# Altium PCB zhukong.PcbDoc
Units mm, origin at the board's own origin, x right, y up, seen from the top; angles counter-clockwise.
Board outline 83.59 x 80.22 mm, 2 copper layers (Top Layer, Bottom Layer); 101 components, 180 nets, 437 pads, 116 vias.
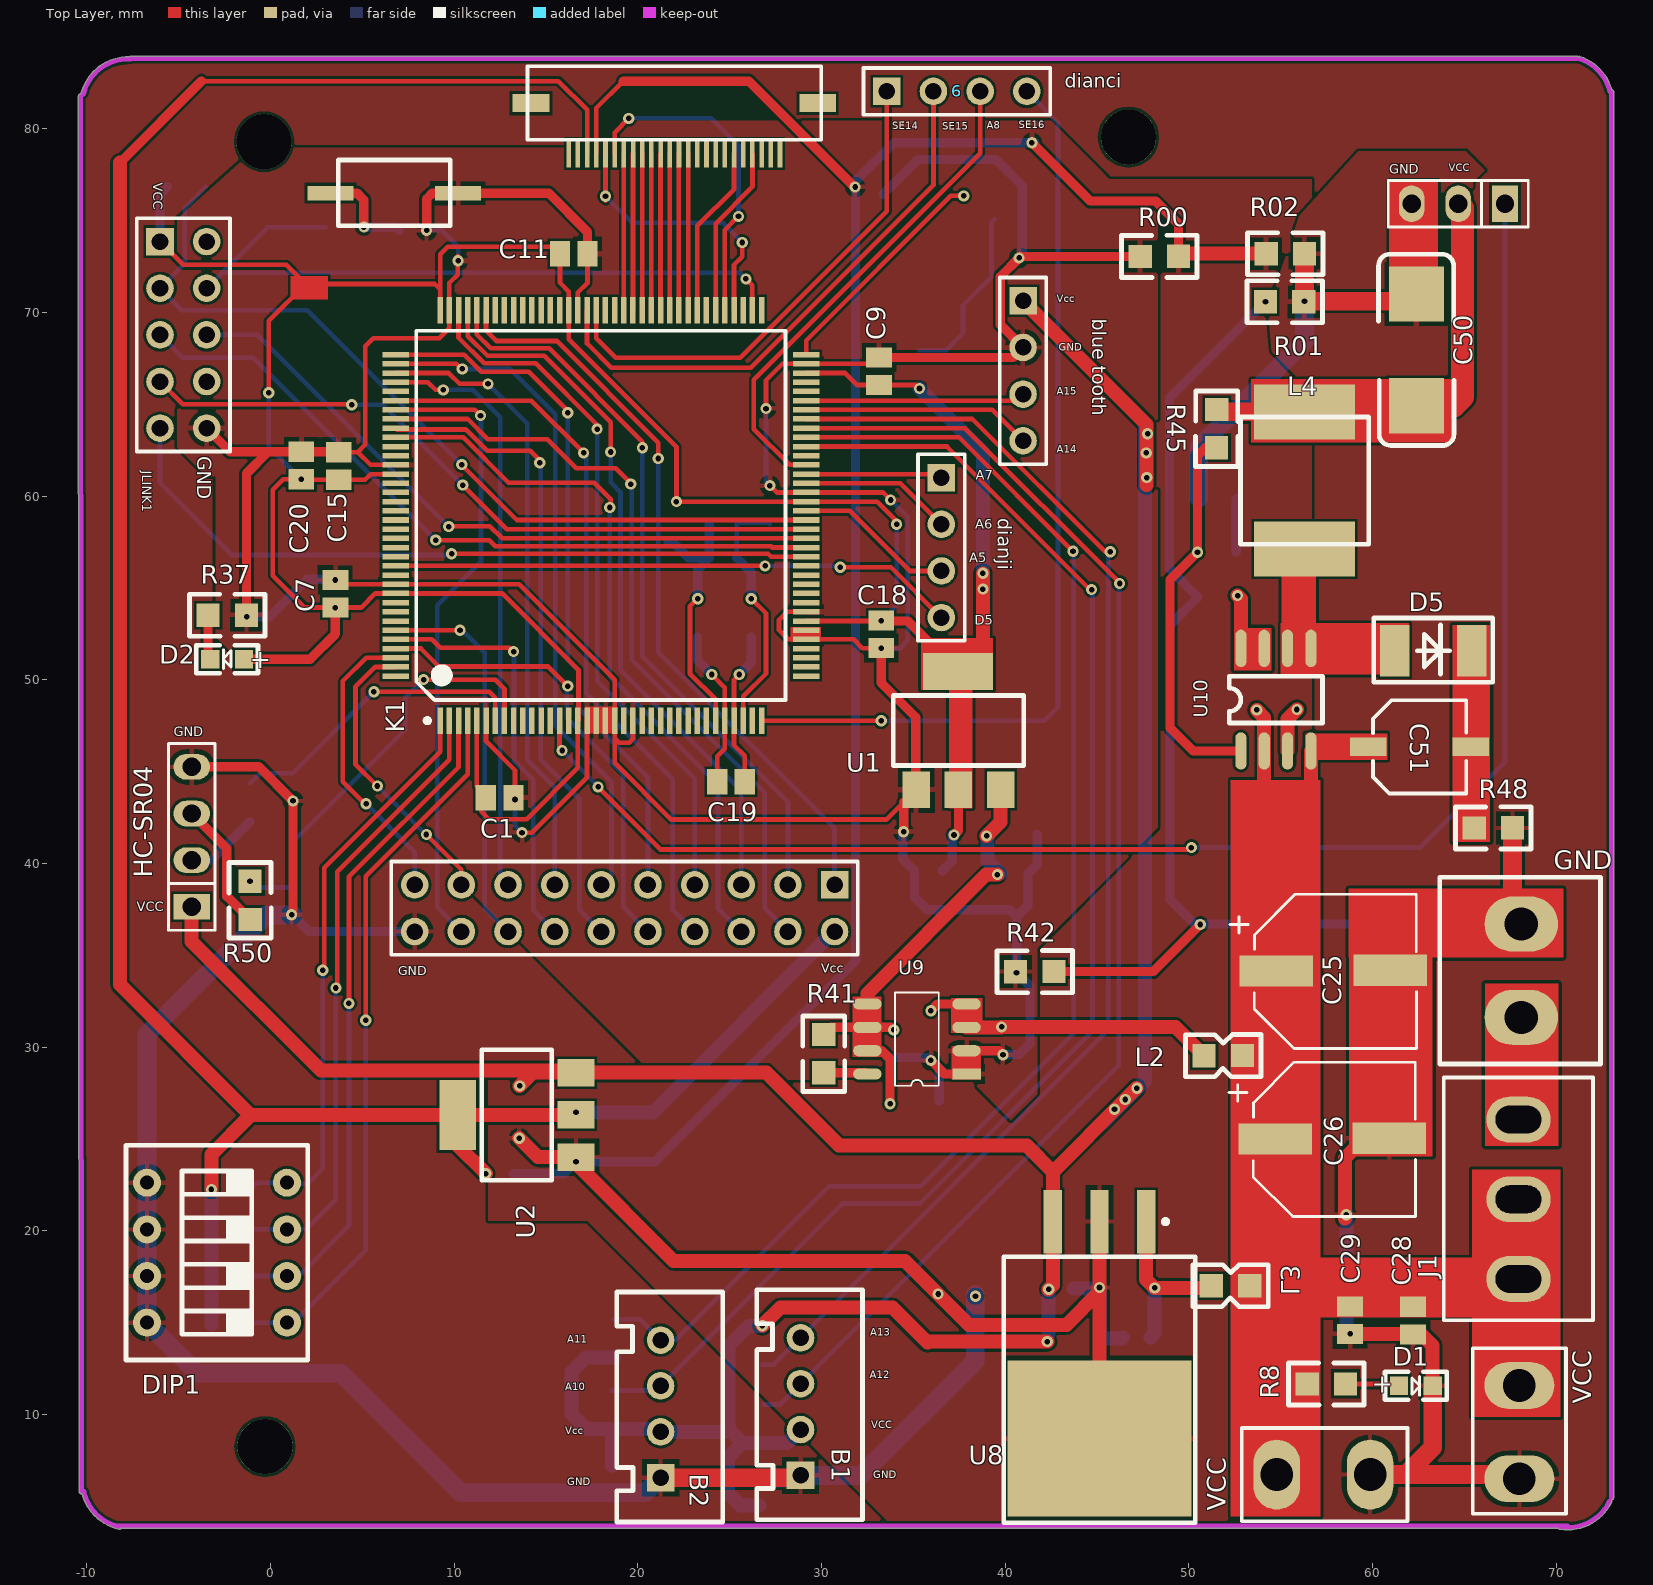
[diagram p0: Top Layer view]
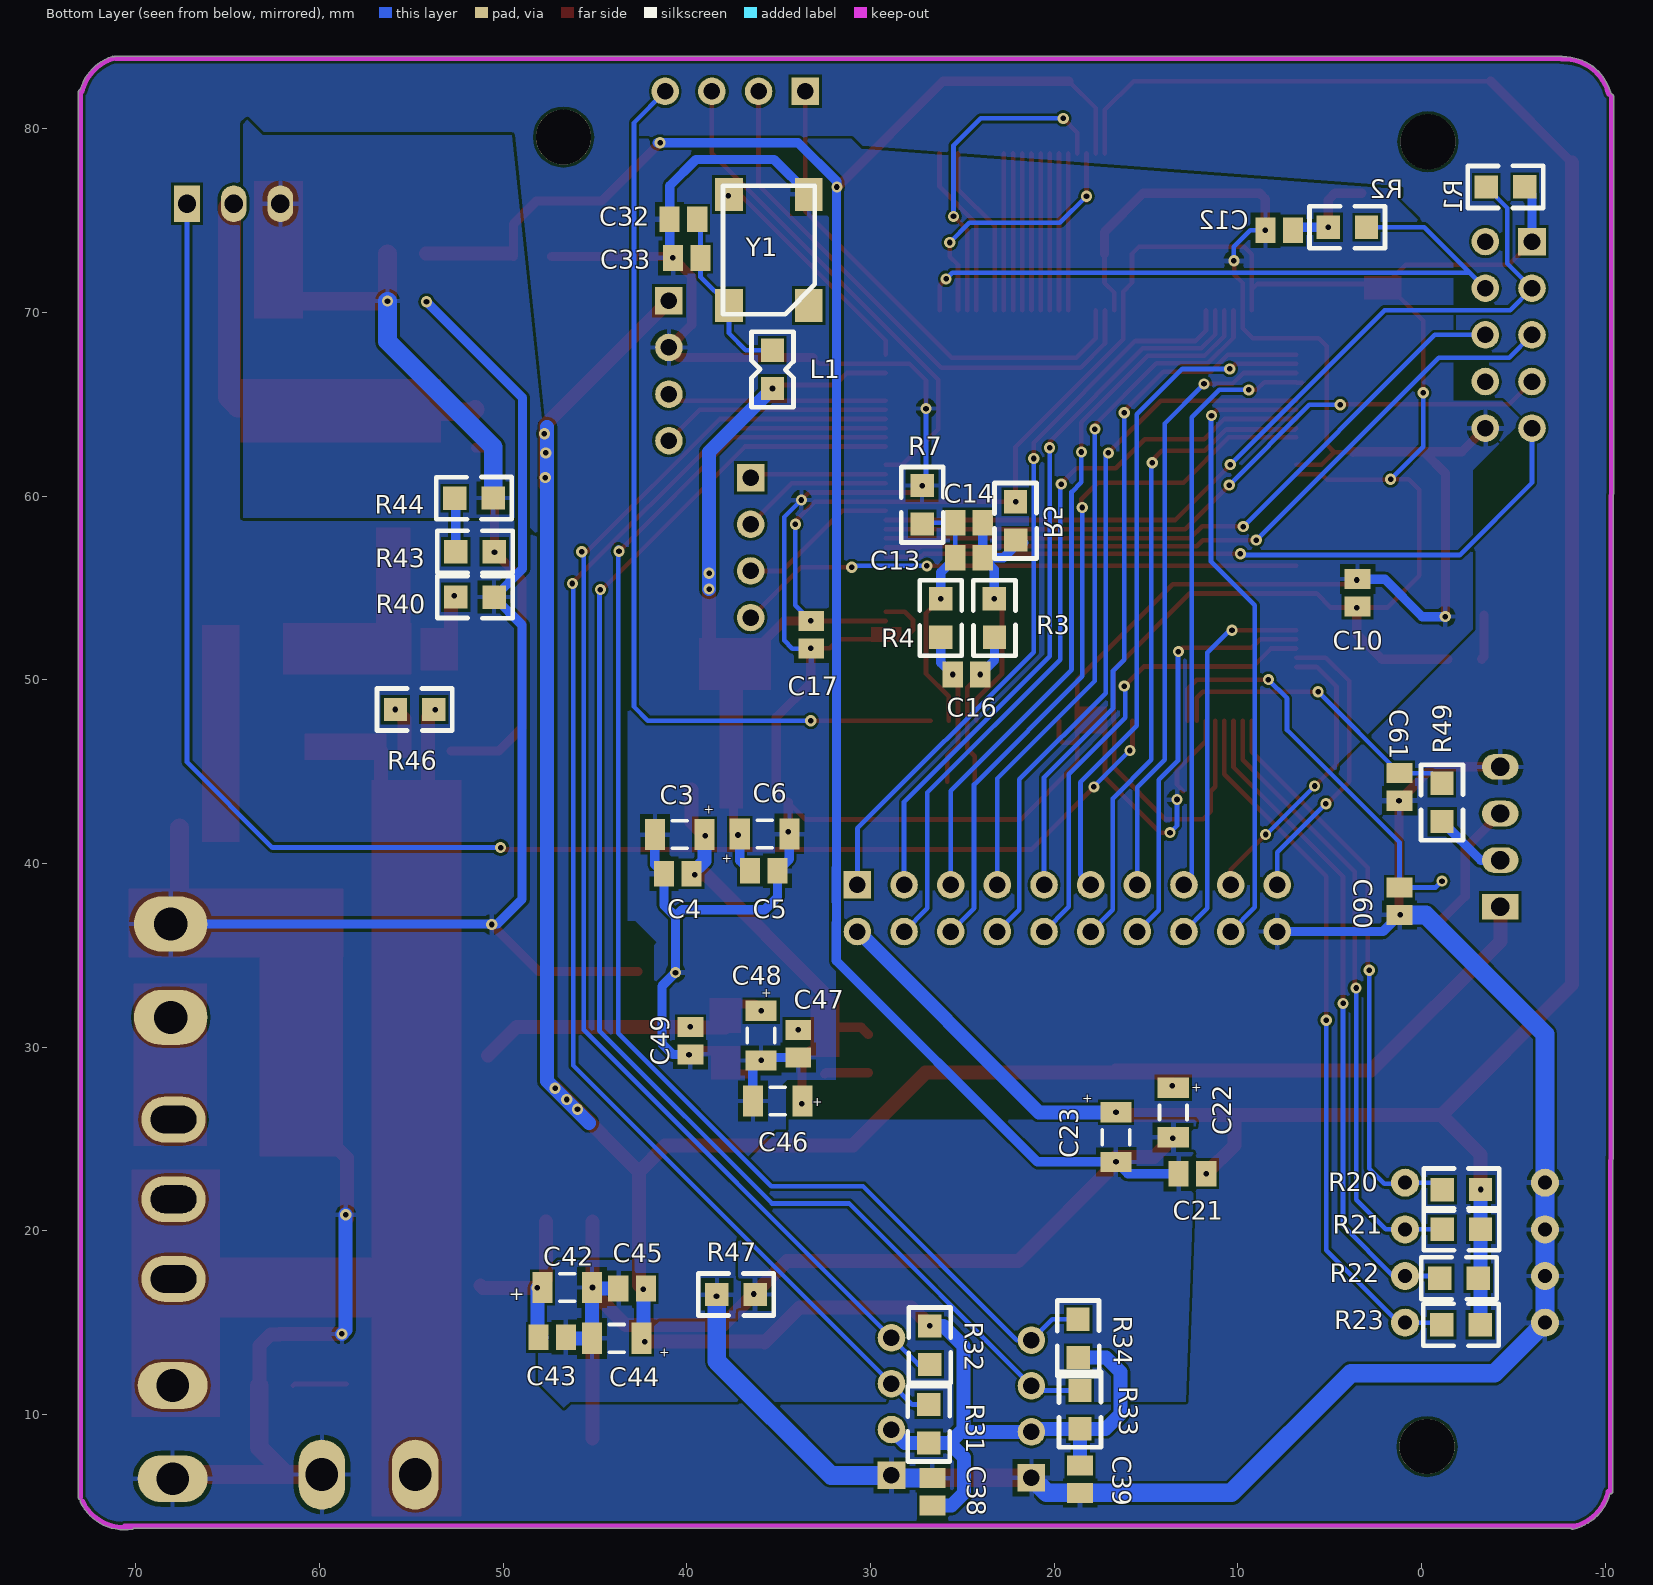
[diagram p1: Bottom Layer view, seen from below]

## Layer stack, top to bottom
Top Solder: solder mask 0.0102, Solder Resist, Dk 3.5
Top Layer: signal copper 0.0356
Dielectric1: dielectric 0.32, FR-4, Dk 4.8
Bottom Layer: signal copper 0.0356
Bottom Solder: solder mask 0.0102, Solder Resist, Dk 3.5

## Board outline
-10.261,5.679 cw(c-10.287,5.804) -10.415,5.804 -10.465,78.181 cw(c-10.338,78.181) -10.465,78.181 -10.465,81.765 cw(c-10.338,81.765) -10.427,81.856 -10.428,81.855 -10.296,81.987 cw(c-7.747,81.28) -7.693,83.925 cw(c-7.621,83.82) -7.621,83.947 71.12,83.947 cw(c71.12,83.82) 71.189,83.927 cw(c71.254,83.817) 71.293,83.938 cw(c70.477,81.421) 73.022,82.142 cw(c73,82.017) 73.127,82.017 73.127,5.486 cw(c73,5.486) 73.019,5.36 cw(c72.908,5.297) 73.036,5.297 cw(c72.908,5.297) 73.024,5.243 cw(c70.631,6.371) 70.187,3.763 cw(c70.209,3.889) 70.109,3.81 -8.119,3.81 cw(c-8.221,3.886) -8.247,3.761 cw(c-7.702,6.35)

## Design rules (kind name [scope] priority, off if disabled: settings)
Clearance 安全距离 [All] p1: gap=0.152
FabricationTestpoint [(IsPad And (OnTopLayer Or OnBottomLayer))] p1: side=3 testpointundercomponent=TRUE minsize=1.016 maxsize=2.54 preferedsize=1.524 minholesize=0 maxholesize=1.016 preferedholesize=0.813 testpointgrid=0.025 allowsidetop=TRUE allowsidebottom=TRUE usegrid=TRUE gridtolerance=0
HoleSize [All] p1: absolutevalues=TRUE maxlimit=5 minlimit=0.025 maxpercent=80.000 minpercent=20.000
PolygonConnect [All] p1: connectstyle=Relief reliefconductorwidth=0.254 reliefentries=4 polygonreliefangle="90 Angle" airgapwidth=0.254
RoutingVias [All] p1: holewidth=0.711 width=1.27 viastyle="Through Hole" minholewidth=0.711 minwidth=1.27 maxholewidth=0.711 maxwidth=1.27
SolderMaskExpansion [All] p1: expansion=0.102
UnpouredPolygon [All] p1: allowunpoured=FALSE
Width VCC7.2 [InNet('VCC_7.2V')] p1: maxlimit=2.54 minlimit=0.152 preferedwidth=2.54
Width VCC3.3 [InNet('VCC_3V3')] p2: maxlimit=2.54 minlimit=0.152 preferedwidth=0.508
Width GND [InNet('GND')] p3: maxlimit=2.54 minlimit=0.152 preferedwidth=0.508
Width 其他 [All] p4: maxlimit=2.54 minlimit=0.127 preferedwidth=0.508
27 further rules are at their usual default settings.

## Classes and differential pairs
component class 原理图: B1 B2 "blue tooth" C1 C3 C4 C5 C6 C7 C9 C10 C11 C12 C13 C14 C15 C16 C17 C18 C19 C20 C21 C22 C23 C25 C26 C28 C29 C32 C33 C38 C39 C42 C43 C44 C45 C46 C47 C48 C49 C50 C51 C60 C61 D1 D2 D5 DIP1 GND HC-SR04 J1 JLINK1 L1 L2 L3 L4 R1 R2 R3 R4 R5 R7 R8 R31 R32 R33 R34 R37 R40 R42 R43 R44 R45 R46 R47 R48 R49 R50 U2 U8 U9 U10 Y1

## Components (designator, comment, footprint, x,y, rotation, side; value= is the part's Value field where it differs from the comment)
6 "Comment" HDR1X4#1 33.553,82.042 r0 top
B1 "MHDR1X4" 3PIN-2.54 28.854,6.68 r90 top
B2 "MHDR1X4" 3PIN-2.54 21.234,6.557 r90 top
"blue tooth" "Header 4" HDR1X4#2 40.97,70.637 r270 top (schematic designator P1)
C1 "0.1uF" c0805 12.471,43.586 r180 top
C3 "10uF/16V" C1206 40.386,41.58 r0 bottom
C4 "0.1uF" c0805 40.488,39.446 r180 bottom
C5 "0.1uF" c0805 35.814,39.599 r0 bottom
C6 "10uF/16V" C1206 35.763,41.605 r180 bottom
C7 "0.1uF" c0805 3.531,54.686 r270 top
C9 "0.1uF" c0805 33.129,66.802 r90 top
C10 "0.1uF" c0805 3.48,54.747 r270 bottom
C11 "0.1uF" c0805 16.51,73.203 r0 top
C12 "0.1uF" c0805 7.747,74.473 r180 bottom
C13 "Cap Semi" C0805 24.634,56.642 r180 bottom
C14 "10μF" C0805 24.634,58.547 r180 bottom
C15 "0.1uF" c0805 3.708,61.646 r90 top
C16 "Cap Semi" C0805 24.773,50.292 r180 bottom
C17 "0.1uF" c0805 33.223,52.451 r270 bottom
C18 "0.1uF" c0805 33.249,52.476 r270 top
C19 "Cap Semi" C0805 25.07,44.45 r180 top
C20 "0.1uF" c0805 1.676,61.671 r90 top
C21 "0.1uF" C0805 12.471,23.114 r180 bottom
C22 "10uF/16V" C1206 13.513,26.441 r270 bottom
C23 "10uF/16V" C1206 16.629,25.104 r270 bottom
C25 "470uF/16V" C8X8MM 60.968,34.188 r0 top
C26 "470uF/16V" C8X8MM 60.909,25.044 r0 top
C28 "0.1uF" C0805 62.205,15.113 r90 top
C29 "0.1uF" C0805 58.776,15.138 r270 top
C32 "10uF" c0805 40.183,75.082 r180 bottom
C33 "0.1uF" c0805 40.005,72.974 r180 bottom
C38 "0.1uF" C0805 26.619,5.791 r90 bottom
C39 "0.1uF" C0805 18.588,6.481 r270 bottom
C42 "10uF/25V" C1206 46.507,16.916 r180 bottom
C43 "0.1uF" C0805 47.32,14.199 r0 bottom
C44 "10uF/16V" C1206 43.815,14.148 r0 bottom
C45 "0.1uF" C0805 42.977,16.866 r180 bottom
C46 "10uF/16V" C1206 35.052,27.076 r0 bottom
C47 "0.1uF" C0805 33.934,30.189 r90 bottom
C48 "10uF/25V" C1206 35.953,30.632 r270 bottom
C49 "0.1uF" C0805 39.802,30.353 r90 bottom
C50 "10uF/25V" "PCBComponent_1 - duplicate6" 62.382,64.922 r90 top
C51 "22uF" CAP5X5 62.56,46.355 r0 top
C60 "0.1uF" C0805 1.194,37.948 r90 bottom
C61 "0.1uF" C0805 1.194,44.171 r90 bottom
CAM1 "Header 24" 24PIN0.5MM软排座 10.236,82.906 r180 top
D1 "LED0" d0603 62.382,11.557 r0 top
D2 "LED0" d0603 -2.388,51.13 r180 top
D5 "Diode 1N914" SMA 61.214,51.587 r0 top
dianci "Header 10X2" HDR2X10 30.709,38.837 r180 top (schematic designator LCD1)
dianji "Header 4" HDR1X4#2 36.525,61.011 r270 top (schematic designator P1)
DIP1 "Header 4X2" "PCBComponent_1 - duplicate1" 0.889,22.619 r270 top
GND "Header 2" "PCBComponent_1 - duplicate5" 68.097,31.623 r90 top (schematic designator J2)
GND "Header 3" SIP3 67.208,75.921 r180 top (schematic designator SEV1)
HC-SR04 "Header 4" SIP4 -4.293,37.643 r90 top
J1 "Header 3" 7.2 67.945,26.06 r270 top
JLINK1 "Header 5X2" HDR2X5 -6.02,73.863 r270 top
K1 "K60" K60_QFP144 18.085,59.055 r90 top
L1 "100MHZ" l0805 35.331,65.862 r90 bottom
L2 "" L0805 50.825,29.54 r0 top
L3 "Inductor" L0805 53.315,17.018 r180 top
L4 "10uH" 电感7x7 56.363,60.935 r90 top
R00 "0" R0805#1 47.346,73.05 r0 top (schematic designator R47)
R01 "0" R0805#1 56.261,70.587 r180 top (schematic designator R47)
R1 "10K" R0805#1 -3.531,76.835 r180 bottom
R02 "0" R0805#1 54.204,73.203 r0 top (schematic designator R47)
R2 "10K" r0805 5.08,74.651 r180 bottom
R3 "0" R0805#1 23.249,52.324 r90 bottom
R4 "0" R0805#1 26.17,52.324 r90 bottom
R5 "0" R0805#1 22.098,59.703 r270 bottom
R7 "0" R0805#1 27.186,60.579 r270 bottom
R8 "Res1" R0805#1 56.439,11.659 r0 top
R20 "100K" R0805#1 -3.22,22.25 r0 bottom
R21 "100K" R0805#1 -3.22,20.091 r0 bottom
R22 "100K" R0805#1 -3.093,17.424 r0 bottom
R23 "100K" R0805#1 -3.2,14.884 r0 bottom
R31 "4.7K" R0805#1 26.822,10.541 r270 bottom
R32 "4.7K" R0805#1 26.772,12.725 r90 bottom
R33 "4.7K" R0805#1 18.593,11.307 r270 bottom
R34 "4.7K" R0805#1 18.694,15.193 r270 bottom
R37 "1K" R0805#1 -3.404,53.518 r0 top
R40 "0" R0805#2 52.578,54.508 r180 bottom
R41 "250K" R0805#3 30.124,28.6 r90 bottom
R42 "0" R0805#1 40.564,34.112 r0 top
R43 "10K" R0805#1 52.578,56.972 r180 bottom
R44 "0" R0805#1 52.629,59.893 r180 bottom
R45 "68K" R0805#2 51.511,64.719 r270 top
R46 "2.7K" R0805#1 53.772,48.387 r0 bottom
R47 "0" R0805#1 36.271,16.535 r0 bottom
R48 "0" R0805#1 65.532,41.935 r0 top
R49 "100K" R0805#1 -1.118,44.374 r270 bottom
R50 "100K" R0805#1 -1.118,39.04 r270 top
SW1 "SW-PB" key 9.779,74.727 r180 top
U1 "AMS1117-3V3" SOT-223 37.389,47.32 r0 top
U2 "AMS117" SOT-223 13.327,26.247 r90 top
U8 "LM2940" TO263 45.136,14.275 r270 top
U9 "TPS7350" sop8#1 37.893,28.538 r180 top
U10 "AS1015" sop8#2 52.807,46.152 r90 top
VCC "Header 2" 1 54.788,6.731 r0 top (schematic designator J3)
VCC "Header 2" 1 67.996,6.502 r90 top (schematic designator J3)
Y1 "MCG 50M" MCG 33.35,70.383 r90 bottom

## Footprints (in the part's own frame and the unit in brackets; to place one, negate y for a bottom-side part, rotate by r counter-clockwise, add the part's x,y. Pads: shape width x height; smd on the part's side, far side on the other; paste and mask are expansions set on the pad)
1 [mil]
  oval 100x150 hole 70: 1(0,0) 2(200,0)
  silkscreen extent -75,-100 280,100
3PIN-2.54 [mm]
  rect 1.5x1.5 hole 0.9: 1(0,0)
  round 1.5 hole 0.9: 2(2.5,0) 3(5,0) 4(7.493,0)
  silkscreen extent -2.41,-3.38 10.11,2.39
7.2 [mm]
  oval 2.5x3.5 hole 1.5 slot 2.5 at 90 deg: 1(0,0) 2(4.34,0) 3(8.68,0)
  silkscreen extent -2.29,-4.06 10.92,4.06
24PIN0.5MM软排座 [mm]
  rect 0.25x1.5 smd: 1(-6,4.25) 2(-6.5,4.25) 3(-7,4.25) 4(-7.5,4.25) 5(-8,4.25) 6(-8.5,4.25) 7(-9,4.25) 8(-9.5,4.25) 9(-10,4.25) 10(-10.5,4.25) 11(-11,4.25) 12(-11.5,4.25) 13(-12,4.25) 14(-12.5,4.25) 15(-13,4.25) 16(-13.5,4.25) 17(-14,4.25) 18(-14.5,4.25) 19(-15,4.25) 20(-15.5,4.25) 21(-16,4.25) 22(-16.5,4.25) 23(-17,4.25) 24(-17.5,4.25)
  rect 2x1 smd: 25(-3.95,1.5) 26(-19.55,1.5)
  silkscreen extent -19.75,-0.5 -3.75,3.5
C8X8MM [mm]
  rect 4x1.7 smd: 1(-6.202,-0.042) 2(0,0)
  silkscreen extent -8.73,-4.27 1.43,4.14, body extent -7.6,-4.2 1.4,4.1, height 10.5
c0805 [mm] "Chip Capacitor, Body 2.0x1.3mm, IPC High Density"
  rect 1.1x1.4 smd: 1(-0.75,0) 2(0.75,0)
  body extent -1.1,-0.72 1.1,0.72, height 1.4
C0805 [mm] "Chip Capacitor, Body 2.0x1.3mm, IPC High Density"
  rect 1.1x1.4 smd: 1(-0.75,0) 2(0.75,0)
  body extent -1.1,-0.72 1.1,0.72, height 1.4
C1206 [mm] "Chip Capacitor, Body 3.2x1.6mm, IPC High Density"
  rect 1.1x1.7 smd: 1(-1.35,0) 2(1.35,0)
  silkscreen extent -0.4,-0.75 0.4,0.75, body extent -1.7,-0.9 1.7,0.9, height 1.3
CAP5X5 [mm]
  rect 2x1 smd: 1(-2.794,0) 2(2.794,0)
  silkscreen extent -2.54,-2.54 2.54,2.54, body extent -2.27,-2.15 2.33,2.15, height 5.2
d0603 [mm]
  rect 1x1 smd: 1(-0.94,0) 2(0.889,0)
  silkscreen extent -1.7,-0.76 1.65,0.76, body extent -1.03,-0.53 0.99,0.53, height 0.46
HDR1X4#1 [mm] "Connector; Header; 4 Position"
  rect 1.5x1.5 hole 0.9 paste+0: 1(0,0)
  round 1.5 hole 0.9: 2(2.54,0) 3(5.08,0) 4(7.62,0)
  silkscreen extent -1.27,-1.27 8.89,1.27
HDR1X4#2 [mm] "Connector; Header; 4 Position"
  rect 1.5x1.5 hole 0.9: 1(0,0)
  round 1.5 hole 0.9: 2(2.54,0) 3(5.08,0) 4(7.62,0)
  silkscreen extent -1.27,-1.27 8.89,1.27
HDR2X5 [mm] "Connector; Header; 5x2 Position"
  rect 1.5x1.5 hole 0.9: 1(0,0)
  round 1.5 hole 0.9: 2(0,2.54) 3(2.54,0) 4(2.54,2.54) 5(5.08,0) 6(5.08,2.54) 7(7.62,0) 8(7.62,2.54) 9(10.16,0) 10(10.16,2.54)
  silkscreen extent -1.27,-1.27 11.43,3.81
HDR2X10 [mm] "Connector; Header; 10x2 Position"
  rect 1.5x1.5 hole 0.9: 1(0,0)
  round 1.5 hole 0.9: 2(0,2.54) 3(2.54,0) 4(2.54,2.54) 5(5.08,0) 6(5.08,2.54) 7(7.62,0) 8(7.62,2.54) 9(10.16,0) 10(10.16,2.54) 11(12.7,0) 12(12.7,2.54) 13(15.24,0) 14(15.24,2.54) 15(17.78,0) 16(17.78,2.54) 17(20.32,0) 18(20.32,2.54) 19(22.86,0) 20(22.86,2.54)
  silkscreen extent -1.27,-1.27 24.13,3.81
K60_QFP144 [mm] "0.5mm Pitch QFP144, Kinetis K60"
  rect 1.45x0.3 smd: 1(-11.277,8.852) 2(-11.277,8.352) 3(-11.277,7.852) 4(-11.277,7.352) 5(-11.277,6.852) 6(-11.277,6.352) 7(-11.277,5.852) 8(-11.277,5.352) 9(-11.277,4.852) 10(-11.277,4.352) 11(-11.277,3.852) 12(-11.277,3.352) 13(-11.277,2.852) 14(-11.277,2.352) 15(-11.277,1.852) 16(-11.277,1.352) 17(-11.277,0.852) 18(-11.277,0.352) 19(-11.277,-0.148) 20(-11.277,-0.648) 21(-11.277,-1.148) 22(-11.277,-1.648) 23(-11.277,-2.148) 24(-11.277,-2.648) 25(-11.277,-3.148) 26(-11.277,-3.648) 27(-11.277,-4.148) 28(-11.277,-4.648) 29(-11.277,-5.148) 30(-11.277,-5.648) 31(-11.277,-6.148) 32(-11.277,-6.648) 33(-11.277,-7.148) 34(-11.277,-7.648) 35(-11.277,-8.148) 36(-11.277,-8.648) 73(11.073,-8.648) 74(11.073,-8.148) 75(11.073,-7.648) 76(11.073,-7.148) 77(11.073,-6.648) 78(11.073,-6.148) 79(11.073,-5.648) 80(11.073,-5.148) 81(11.073,-4.648) 82(11.073,-4.148) 83(11.073,-3.648) 84(11.073,-3.148) 85(11.073,-2.648) 86(11.073,-2.148) 87(11.073,-1.648) 88(11.073,-1.148) 89(11.073,-0.648) 90(11.073,-0.148) 91(11.073,0.352) 92(11.073,0.852) 93(11.073,1.352) 94(11.073,1.852) 95(11.073,2.352) 96(11.073,2.852) 97(11.073,3.352) 98(11.073,3.852) 99(11.073,4.352) 100(11.073,4.852) 101(11.073,5.352) 102(11.073,5.852) 103(11.073,6.352) 104(11.073,6.852) 105(11.073,7.352) 106(11.073,7.852) 107(11.073,8.352) 108(11.073,8.852)
  rect 0.3x1.45 smd: 37(-8.852,-11.073) 38(-8.352,-11.073) 39(-7.852,-11.073) 40(-7.352,-11.073) 41(-6.852,-11.073) 42(-6.352,-11.073) 43(-5.852,-11.073) 44(-5.352,-11.073) 45(-4.852,-11.073) 46(-4.352,-11.073) 47(-3.852,-11.073) 48(-3.352,-11.073) 49(-2.852,-11.073) 50(-2.352,-11.073) 51(-1.852,-11.073) 52(-1.352,-11.073) 53(-0.852,-11.073) 54(-0.352,-11.073) 55(0.148,-11.073) 56(0.648,-11.073) 57(1.148,-11.073) 58(1.648,-11.073) 59(2.148,-11.073) 60(2.648,-11.073) 61(3.148,-11.073) 62(3.648,-11.073) 63(4.148,-11.073) 64(4.648,-11.073) 65(5.148,-11.073) 66(5.648,-11.073) 67(6.148,-11.073) 68(6.648,-11.073) 69(7.148,-11.073) 70(7.648,-11.073) 71(8.148,-11.073) 72(8.648,-11.073) 109(8.648,11.277) 110(8.148,11.277) 111(7.648,11.277) 112(7.148,11.277) 113(6.648,11.277) 114(6.148,11.277) 115(5.648,11.277) 116(5.148,11.277) 117(4.648,11.277) 118(4.148,11.277) 119(3.648,11.277) 120(3.148,11.277) 121(2.648,11.277) 122(2.148,11.277) 123(1.648,11.277) 124(1.148,11.277) 125(0.648,11.277) 126(0.148,11.277) 127(-0.352,11.277) 128(-0.852,11.277) 129(-1.352,11.277) 130(-1.852,11.277) 131(-2.352,11.277) 132(-2.852,11.277) 133(-3.352,11.277) 134(-3.852,11.277) 135(-4.352,11.277) 136(-4.852,11.277) 137(-5.352,11.277) 138(-5.852,11.277) 139(-6.352,11.277) 140(-6.852,11.277) 141(-7.352,11.277) 142(-7.852,11.277) 143(-8.352,11.277) 144(-8.852,11.277)
  silkscreen extent -11.4,-9.95 9.95,10.15
key [mm]
  rect 2.5x0.8 smd: 1(-0.425,-1.775) 2(6.525,-1.775)
  silkscreen extent 0,-3.57 6.1,0
l0805 [mm] "1/8W"
  rect 1.27x1.27 smd: 1(0,0) 2(2.09,0.005)
  silkscreen extent -1.01,-1.14 3.1,1.15, body extent 0.04,-0.62 2.04,0.64, height 0.55
L0805 [mm] "1/8W"
  rect 1.27x1.27 smd: 1(0,0) 2(2.09,0.005)
  silkscreen extent -1.01,-1.14 3.1,1.15, body extent 0.04,-0.62 2.04,0.64, height 0.55
MCG [mm]
  rect 1.8x1.5 smd: 1(0,0) 2(6.05,0) 3(6.05,4.35) 4(0,4.35)
  silkscreen extent -0.48,-0.33 6.53,4.67
"PCBComponent_1 - duplicate1" [mil]
  round 60 hole 30: 1(0,0) 2(100,0) 3(200,0) 4(300,0) 5(300,-300) 6(200,-300) 7(100,-300) 8(0,-300)
  silkscreen extent -80,-345 380,45
"PCBComponent_1 - duplicate5" [mm]
  oval 3x4 hole 1.8: 1(0,0) 2(5.08,0)
  silkscreen extent -2.54,-4.32 7.62,4.45
"PCBComponent_1 - duplicate6" [mm]
  rect 3x3 smd: 1(0,0) 2(6.096,0)
  silkscreen extent -2.16,-2.05 8.26,2.05
R0805#1 [mm] "1/8W"
  rect 1.27x1.27 smd: 1(0,0) 2(2.09,0.005)
  silkscreen extent -1.01,-1.14 3.1,1.15, body extent 0.04,-0.62 2.04,0.64, height 0.55
R0805#2 [mm] "1/8W"
  rect 1.27x1.27 smd: 1(0,0) 2(2.09,-0.005)
  silkscreen extent -1.01,-1.15 3.1,1.14, body extent 0.04,-0.64 2.04,0.62, height 0.55
R0805#3 [mm] "1/8W"
  rect 1.27x1.27 smd far side: 1(0,0) 2(2.09,-0.005)
  body extent 0.04,-0.64 2.04,0.62, height 0.55
r0805 [mm] "1/8W"
  rect 1.27x1.27 smd: 1(0,0) 2(2.09,-0.005)
  silkscreen extent -1.01,-1.15 3.1,1.14, body extent 0.04,-0.64 2.04,0.62, height 0.55
SIP3 [mm]
  rect 1.4x2 hole 1: 1(0,0)
  oval 1.4x2 hole 1: 2(2.54,0) 3(5.08,0)
  silkscreen extent -1.27,-1.27 6.35,1.27, body extent -1.21,-1.25 6.29,1.25, height 16.31
SIP4 [mm]
  rect 1.4x2 hole 1: 1(0,0)
  oval 1.4x2 hole 1: 2(2.54,0) 3(5.08,0) 4(7.62,0)
  silkscreen extent -1.27,-1.27 8.89,1.27, body extent -1.27,-1.27 8.89,1.27, height 8.89
SMA [mil] "DO-214AC(2010)"
  rect 63x110 smd: 1(0,0) 2(165,0)
  silkscreen extent -45,-68 210,70, body extent -8,-53 174,53, height 94
sop8#1 [mil]
  rect 61x24 smd: 1(0,0)
  oval 61x24 smd: 2(0,-50) 3(0,-100) 4(0,-150) 5(212.6,-150) 6(212.6,-100) 7(212.6,-50) 8(212.6,0)
  silkscreen extent 60,-175 153,25
sop8#2 [mil]
  oval 80x24 smd: 1(-1,-1) 2(-1,-51) 3(-1,-101) 4(-1,-151) 5(219,-151) 6(219,-101) 7(219,-51) 8(219,-1)
  silkscreen extent 59,-176 159,24, body extent -9,-174 229,24, height 63
SOT-223 [mil]
  rect 59x79 smd: 1(-88,-130) 2(2.55,-130) 3(93.1,-130)
  rect 150x79 smd: 2(1.88,123.54)
  silkscreen extent -137,-78 143,72, body extent -126,-139 130,135, height 67
TO263 [mm] "D2PAK936"
  rect 3.45x1 smd: 1(-6.225,2.54) 2(-6.225,0) 3(-6.225,-2.54)
  rect 8.5x10 smd: 2(5.588,0)
  silkscreen extent -6.35,-5.21 10.16,5.21, body extent -6.82,-5.05 8.85,4.95, height 4.88
电感7x7 [mm]
  rect 3x5.5 smd: 1(-3.81,0.076) 2(3.658,0.076)
  silkscreen extent -3.56,-3.43 3.38,3.56

## Part data
B1 B2 "blue tooth" dianji HC-SR04: "Header, 4-Pin"
C1 C4 C5 C7 C9 C10 C11 C12 C15 C17 C18 C20 C21 C25 C26 C28 C29 C32 C33 C38 C39 C43 C45 C47 C49 C60 C61: library part Cap, "Capacitor"
C3 C6 C22 C23 C42 C44 C46 C48 C50 C51: library part "Cap Pol1", "Polarized Capacitor (Radial)"
C13 C16 C19: "Capacitor (Semiconductor SIM Model)"
C14: library part "Cap Semi", "Capacitor (Semiconductor SIM Model)"
CAM1: "Header, 24-Pin"
D1 D2: "Typical INFRARED GaAs LED"
D5: "High Conductance Fast Diode"
dianci: "Header, 10-Pin, Dual row"
DIP1: "Header, 4-Pin, Dual row"
GND VCC VCC: "Header, 2-Pin"
GND J1: "Header, 3-Pin"
JLINK1: "Header, 5-Pin, Dual row"
K1 U9 U10: library part Component_1
L1 L2 L4: library part Inductor, "Inductor"
R00 R01 R1 R02 R2 R3 R4 R5 R7 R20 R21 R22 R23 R31 R32 R33 R34 R37 R40 R41 R42 R43 R44 R45 R46 R47 R48 R49 R50: library part Res1, "Resistor"
R8: "Resistor"
SW1: "Switch"
U1 U2 U8: library part "Volt Reg", "Voltage Regulator"
Y1: library part Component_2

## Free pads (board coordinates)
  round 3 hole 3: 0(-0.356,79.299) 0(-0.305,8.255) 0(46.711,79.553)

## Via types
v1: diameter 0.61, hole 0.305, Top Layer to Bottom Layer, 116 vias

## Nets (pads, with @x,y where several pads share a name; then routed paths per layer and width w, separated by ;. In a path a pad name is that pad's centre, name@x,y a point inside that pad or via, vN(x,y) a via of type N, cw(c..) or ccw(c..) an arc to the next point about the centre after c; other vN are vias at no path point)
3V3_MCU: C1.2 C5.2 C6.1 C7.2 C9.1 C10.2 C11.1 C15.1 C17.1 C18.1 C20.1 D2.1 JLINK1.1 K1.5 K1.16 K1.43 K1.56 K1.70 K1.94 K1.108 K1.122 K1.135 L1.1 R1.2 R5.1 U1.2 | length 170.3
  Top Layer w0.254: JLINK1.1 -4.75,72.593 0.864,72.593 1.905,71.552 ; v1(-0.102,65.634) -0.102,69.545 1.905,71.552 ; K1.122 5.45,61.203 5.143,60.896 C15.1 1.702,60.896 v1(1.676,60.921) 0.698,60.921 0.127,60.35 0.127,55.677 1.868,53.936 v1(3.531,53.936) 4.94,53.936 5.707,54.703 K1.135 12.607,54.703 16.764,50.546 16.764,47.778 K1.16 16.733,45.207 13.945,42.418 11.887,42.418 11.467,42.838 11.467,43.942 11.233,44.176 K1.5 ; K1.108 9.233,71.259 ; K1.43 C18.1@33.226,53.203 ; K1.70 31.29,66.703 31.941,66.052 C9.1 35.142,66.052 v1(35.331,65.862) ; v1(34.087,58.471) 34.251,58.471 33.172,59.55 33.172,59.563 33.032,59.703 K1.56 v1(22.098,59.703) 22.098,62.687 16.233,68.552 K1.94 16.233,71.143 15.76,71.616 C11.1 15.379,73.584 9.652,73.584 9.233,73.165 9.233,71.259 ; 1.905,71.552 8.941,71.552 9.233,71.259
  Top Layer w0.508: D2.1 2.159,51.13 3.531,52.502 v1(3.531,53.936) ; C18.1@33.226,53.203 34.691,53.203 37.437,50.458 38.786,51.807 ; v1(37.211,41.554) 37.454,41.797 U1.2@37.454,44.018
  Top Layer w0.762: 38.786,51.807 v1(38.786,55.804)
  Bottom Layer w0.254: v1(-0.102,65.634) -0.102,62.699 v1(1.676,60.921) ; C17.1 34.087,54.065 v1(34.087,58.471)
  Bottom Layer w0.508: JLINK1.1 -6.02,76.441 R1.2 ; C5.2 37.113,40.148 C6.1
  Bottom Layer w0.762: v1(35.331,65.862) 38.786,62.408 v1(38.786,54.94)
  other v1: 33.249,53.226
A0: JLINK1.9 K1.50 | length 39.8
  Top Layer w0.254: v1(9.855,56.871) 27.083,56.871 27.25,56.703 K1.50
  Bottom Layer w0.254: JLINK1.9 -6.02,60.731 -2.083,56.794 v1@9.855,56.794
A1: JLINK1.5 K1.51 | length 40
  Top Layer w0.254: v1(8.992,57.607) 11.915,57.607 12.245,57.277 27.251,57.277 27.325,57.203 K1.51
  Bottom Layer w0.254: JLINK1.5 -4.775,67.539 -0.94,67.539 v1(8.992,57.607)
A2: JLINK1.6 K1.52 | length 37.2
  Top Layer w0.254: v1(9.703,58.344) 9.728,58.369 11.938,58.369 12.604,57.703 K1.52
  Bottom Layer w0.254: JLINK1.6 -0.737,68.783 v1(9.703,58.344)
A3: JLINK1.7 K1.53 | length 38.8
  Top Layer w0.254: JLINK1.7 -4.775,64.999 v1@4.623,64.999 ; v1@10.414,60.655 v1(10.465,60.604) 12.866,58.203 K1.53
  Bottom Layer w0.254: v1(4.42,64.973) 6.096,64.973 v1(10.465,60.604)
A4: JLINK1.3 K1.54 R1.1 | length 47
  Top Layer w0.254: v1(10.414,61.722) 10.414,61.697 13.407,58.703 K1.54
  Bottom Layer w0.254: R1.1 -4.674,75.692 -4.674,72.669 JLINK1.3 -4.826,70.129 2.007,70.129 v1(10.414,61.722)
A5: dianji.3 K1.55 | length 8.7
  Top Layer w0.254: K1.55 31.525,59.203 34.798,55.931 dianji.3
A6: dianji.2 K1.58 | length 8.3
  Top Layer w0.254: K1.58 34.293,60.703 dianji.2
A7: dianji.1 K1.59 | length 7
  Top Layer w0.254: K1.59 36.028,61.203 dianji.1@36.144,61.087
A8: 6.3 K1.60 | length 27.1
  Top Layer w0.254: K1.60 28.263,61.703 26.314,63.652 26.314,66.345 38.633,78.664 6.3
A9: K1.61
A10: B2.3 K1.62 R33.1 | length 77.1
  Top Layer w0.254: K1.62 36.829,62.703 44.617,54.915 v1(44.704,54.915)
  Bottom Layer w0.254: R33.1 20.984,11.307 B2.3 31.166,21.488 35.357,21.488 44.755,30.886 v1@44.755,54.915
A11: B2.4 K1.63 R34.1 | length 76
  Top Layer w0.254: K1.63 37.482,63.203 v1(43.688,56.998)
  Bottom Layer w0.254: R34.1 20.091,15.193 B2.4 22.026,14.05 30.404,22.428 35.408,22.428 43.739,30.759 v1@43.739,57.226
A12: B1.3 K1.64 R31.1 | length 73.9
  Top Layer w0.254: K1.64 37.808,63.703 46.228,55.284 v1(46.228,55.245)
  Bottom Layer w0.254: R31.1 27.715,10.541 B1.3 46.177,29.003 46.177,55.067 v1@46.355,55.245
A13: B1.4 K1.65 R32.1 | length 71.8
  Top Layer w0.254: K1.65 38.209,64.203 45.441,56.972 v1(45.72,56.972)
  Bottom Layer w0.254: R32.1 27.407,12.725 B1.4 45.618,30.937 v1@45.618,56.744
A14: "blue tooth.4" K1.66 | length 12.5
  Top Layer w0.254: K1.66 39.284,64.703 40.97,63.017
A15: "blue tooth.3" K1.67 | length 12.1
  Top Layer w0.254: K1.67 40.616,65.203 40.97,65.557 ; 40.896,65.203 40.996,65.303
A16: K1.68
A17: K1.69
A19: K1.73
A24: K1.75
A25: CAM1.5 K1.76 | length 14.9
  Top Layer w0.254: CAM1.5 18.236,76.099 v1@18.237,76.098 ; K1.76 25.233,72.591 25.679,73.037 v1(25.679,73.812)
  Bottom Layer w0.254: v1(18.237,76.327) 19.685,74.879 24.613,74.879 v1(25.679,73.812)
A26: CAM1.6 K1.77 | length 18.1
  Top Layer w0.254: CAM1.6 18.736,79.798 v1(19.507,80.569) ; K1.77 24.733,74.492 v1(25.476,75.235)
  Bottom Layer w0.254: v1(19.507,80.569) 24.003,80.569 25.476,79.096 v1(25.476,75.235)
A27: CAM1.21 K1.78 | length 9.4
  Top Layer w0.254: K1.78 24.233,74.842 26.236,76.845 CAM1.21
A28: K1.79
A29: CAM1.19 K1.80 | length 9.4
  Top Layer w0.254: K1.80 23.233,74.719 25.236,76.722 CAM1.19
ADC0_SE16: 6.4 K1.36 | length 50.7
  Top Layer w0.254: K1.36 K1.36 v1(33.249,47.777)
  Bottom Layer w0.254: v1(33.249,47.777) 42.113,47.777 42.875,48.539 42.875,80.34 6.4
ADC1_SE14: 6.1 K1.91 | length 27.6
  Top Layer w0.254: K1.91 17.733,68.601 18.796,67.539 25.578,67.539 33.553,75.514 6.1
ADC1_SE15: 6.2 K1.92 | length 30.4
  Top Layer w0.254: K1.92 17.233,68.314 18.555,66.992 26.149,66.992 36.093,76.937 6.2
B0: CAM1.14 K1.81 | length 8.5
  Top Layer w0.254: K1.81 22.733,78.653 CAM1.14
B1: CAM1.13 K1.82 | length 8.5
  Top Layer w0.254: K1.82 22.233,78.653 CAM1.13
B2: CAM1.12 K1.83 | length 8.5
  Top Layer w0.254: K1.83 21.733,78.653 CAM1.12
B3: CAM1.11 K1.84 | length 8.5
  Top Layer w0.254: K1.84 21.233,78.653 CAM1.11
B4: CAM1.10 K1.85 | length 8.5
  Top Layer w0.254: K1.85 20.733,78.653 CAM1.10
B5: CAM1.9 K1.86 | length 8.5
  Top Layer w0.254: K1.86 20.233,78.653 CAM1.9
B6: CAM1.8 K1.87 | length 8.5
  Top Layer w0.254: K1.87 19.733,78.653 CAM1.8
B7: CAM1.7 K1.88 | length 8.5
  Top Layer w0.254: K1.88 19.233,78.653 CAM1.7
B8: K1.89
B9: K1.90
B16: K1.95
B17: K1.96
B18: K1.97
B19: K1.98
B20: K1.99
B21: K1.100
B22: K1.101
B23: K1.102
C0: dianci.1 K1.103 | length 41.1
  Top Layer w0.254: K1.103 11.733,69.016 12.296,68.453 15.57,68.453 21.107,62.916 v1(21.107,62.052)
  Bottom Layer w0.254: v1(21.107,62.052) 21.107,51.511 30.709,41.91 dianci.1
C1: dianci.3 K1.104 | length 40.2
  Top Layer w0.254: K1.104 11.233,68.802 11.989,68.047 15.164,68.047 20.244,62.967 v1(20.244,62.636)
  Bottom Layer w0.254: v1(20.244,62.636) 20.244,51.283 28.169,43.358 dianci.3
C2: dianci.5 K1.105 | length 39.3
  Top Layer w0.254: K1.105 10.733,68.718 11.811,67.64 14.91,67.64 18.517,64.033 v1(18.517,62.408)
  Bottom Layer w0.254: v1(18.517,62.408) 18.517,60.757 19.05,60.223 19.05,50.546 25.629,43.967 dianci.5
C3: dianci.7 K1.106 | length 38.2
  Top Layer w0.254: K1.106 10.233,68.634 11.633,67.234 14.427,67.234 17.882,63.779 v1@17.882,63.83
  Bottom Layer w0.254: v1(17.78,63.652) 17.78,49.936 23.089,44.628 dianci.7
C4: dianci.9 K1.109 | length 38.3
  Top Layer w0.254: K1.109 10.545,67.703 11.471,66.777 14.046,66.777 16.18,64.643 v1(16.18,64.541)
  Bottom Layer w0.254: v1(16.18,64.541) 16.18,51.105 16.789,50.495 16.789,48.463 20.549,44.704 dianci.9
C5: dianci.11 K1.110 | length 36.9
  Top Layer w0.254: K1.110 10.114,67.203 v1@10.414,66.904
  Bottom Layer w0.254: v1(10.439,66.929) 13.03,66.929 15.494,64.465 15.494,47.498 18.567,44.425 18.567,39.395 dianci.11
C6: dianci.13 K1.111 | length 34.1
  Top Layer w0.254: K1.111 9.7,66.703 10.287,66.116 v1(11.836,66.116)
  Bottom Layer w0.254: v1@11.722,66.002 11.925,66.002 13.97,63.957 13.97,45.644 15.469,44.145 dianci.13
C7: dianci.15 K1.112 | length 32.5
  Top Layer w0.254: K1.112@6.503,66.178 K1.112@6.782,66.178 ; K1.112 8.561,66.203 8.979,65.786 v1(9.398,65.786)
  Bottom Layer w0.254: v1@9.296,65.786 10.998,65.786 12.497,64.287 12.497,39.268 dianci.15
C8: K1.113
C9: dianci.8 K1.114 | length 40.1
  Top Layer w0.254: K1.114 6.81,65.202 9.64,65.202 9.642,65.203 14.197,65.203 v1(17.043,62.357)
  Bottom Layer w0.254: v1(17.043,62.357) 17.196,62.357 17.196,49.276 21.895,44.577 21.895,37.49 dianci.8
C10: dianci.18 K1.115 | length 34.4
  Top Layer w0.254: K1.115 11.125,64.703 11.43,64.399 v1(11.43,64.389)
  Bottom Layer w0.254: dianci.18 9.068,37.617 9.068,54.051 11.455,56.439 11.455,64.364 v1(11.43,64.389)
C11: dianci.4 K1.116 | length 42.2
  Top Layer w0.254: K1.116 10.727,64.203 11.836,63.094 15.062,63.094 16.637,61.519 18.796,61.519 v1@19.66,60.655
  Bottom Layer w0.254: v1@19.66,60.655 19.66,51.105 26.899,43.866 26.899,37.567 dianci.4
  other v1: 19.609,60.655
C12: dianci.12 K1.117 | length 35.6
  Top Layer w0.254: K1.117 6.879,63.633 10.627,63.633 11.794,62.467 14.14,62.467 14.656,61.951 v1(14.656,61.824)
  Bottom Layer w0.254: v1@14.707,61.824 14.707,45.644 16.815,43.536 16.815,37.49 dianci.12
C13: dianci.6 K1.118 | length 39.6
  Top Layer w0.254: K1.118 10.482,63.203 12.954,60.731 17.628,60.731 18.517,59.842 18.517,59.436 v1(18.466,59.385)
  Bottom Layer w0.254: v1(18.466,59.385) 18.466,50.19 24.359,44.298 24.359,37.567 dianci.6
C14: K1.119
C15: K1.120
C16: K1.123
C17: K1.124
C18: K1.125
C19: K1.126
D0: K1.127
D1: K1.128
D2: K1.129
D3: K1.130
D4: K1.131
D5: dianji.4 K1.132 | length 31
  Top Layer w0.254: K1.132 v1(26.924,56.203) ; v1(31.013,56.134) 33.782,56.134 dianji.4
  Bottom Layer w0.254: v1(26.924,56.203) v1@31.115,56.203
D6: K1.133
D7: K1.136
D8: K1.137
D9: K1.138
D10: dianci.16 K1.139 | length 21.1
  Top Layer w0.254: K1.139 v1(10.312,52.703)
  Bottom Layer w0.254: v1(10.312,52.703) 10.441,52.703 11.659,51.486 11.659,37.567 dianci.16
D11: dianci.14 K1.140 | length 22.9
  Top Layer w0.254: K1.140 8.782,52.203 9.246,51.74 13.03,51.74 v1(13.233,51.537)
  Bottom Layer w0.254: v1(13.233,51.537) 13.259,51.511 13.259,45.593 14.3,44.552 14.3,37.465 dianci.14
D12: dianci.10 K1.141 | length 25.4
  Top Layer w0.254: K1.141 8.19,51.703 9.169,50.724 15.113,50.724 v1(16.18,49.657)
  Bottom Layer w0.254: v1(16.18,49.657) 16.129,49.606 16.129,47.93 19.202,44.856 19.202,37.643 dianci.10
D13: dianci.19 K1.142 | length 16.2
  Top Layer w0.254: v1(5.204,43.256) 5.131,43.256 3.937,44.45 3.937,49.936 5.204,51.203 K1.142
  Bottom Layer w0.254: v1(5.204,43.256) 7.849,40.612 dianci.19
D14: dianci.17 K1.143 | length 15.8
  Top Layer w0.254: v1(5.817,44.221) 4.623,45.415 4.623,49.632 5.695,50.703 K1.143 ; v1(8.484,41.58) 10.389,39.675 dianci.17
  Bottom Layer w0.254: v1(5.817,44.221) 8.458,41.58 v1(8.484,41.58)
D15: K1.144
E0: DIP1.1 K1.1 R20.2 | length 31.7
  Top Layer w0.254: v1(2.845,34.188) 2.921,34.265 2.921,39.776 9.233,46.089 K1.1
  Bottom Layer w0.254: R20.2 -0.756,22.619 DIP1.1 ; DIP1.1@1.118,22.746 0.94,22.569 2.02,22.569 2.845,23.393 v1(2.845,34.188)
E1: DIP1.2 K1.2 R21.2 | length 34
  Top Layer w0.254: v1(3.556,33.223) 3.632,33.299 3.632,39.548 9.733,45.649 K1.2
  Bottom Layer w0.254: R21.2 -1.123,20.079 DIP1.2 1.944,20.079 3.556,21.692 v1(3.556,33.223)
E2: DIP1.3 K1.3 R22.2 | length 36.4
  Top Layer w0.254: v1(4.267,32.385) 4.267,39.268 10.233,45.234 K1.3
  Bottom Layer w0.254: R22.2 -0.883,17.539 DIP1.3 1.537,17.539 4.267,20.269 v1(4.267,32.385)
E3: DIP1.4 K1.4 R23.2 | length 39.1
  Top Layer w0.254: v1(5.182,31.471) 5.182,39.301 10.733,44.853 K1.4
  Bottom Layer w0.254: R23.2 -0.99,14.999 DIP1.4 1.233,14.999 5.182,18.948 v1(5.182,31.471)
E4: C61.2 K1.7 R49.1 | length 16.8
  Top Layer w0.254: v1(5.625,49.352) 11.913,49.352 12.233,49.032 K1.7
  Bottom Layer w0.254: R49.1 -0.571,44.921 C61.2 v1(5.625,49.352)
E5: C60.2 K1.8 R50.1 | length 23.1
  Top Layer w0.254: v1(8.331,50.013) 12.243,50.013 12.733,49.522 K1.8
  Bottom Layer w0.254: v1(-1.118,39.04) -0.775,38.698 C60.2 1.194,41.148 7.315,47.269 7.315,48.997 v1(8.331,50.013)
E6: K1.9
E7: K1.10
E8: K1.11
E9: K1.12
E10: K1.13
E11: GND.1@67.208,75.921 K1.14 | length 87.7
  Top Layer w0.254: K1.14 15.733,46.294 v1(15.875,46.152) ; v1(17.831,44.171) 17.831,44.145 21.209,40.767 50.038,40.767 v1(50.14,40.869)
  Bottom Layer w0.254: v1(15.875,46.152) 17.856,44.171 v1(17.831,44.171) ; v1(50.14,40.869) 62.56,40.869 67.208,45.517 GND.1@67.208,75.921
E12: K1.15
E24: K1.45
E25: K1.46
E26: K1.47
E27: K1.48
E28: K1.49
EN1: 
EN1_IN: 
EN2: 
EN2_IN: 
EXTAL: K1.72 Y1.3 | length 12.6
  Top Layer w0.254: K1.72 29.158,68.477 37.033,76.352 v1(37.744,76.352)
GND: B1.1 B2.1 C25.2 C26.2 C28.1 C29.2 C38.2 C39.2 C60.1 C61.1 D1.2 dianci.20 DIP1.5 DIP1.6 DIP1.7 DIP1.8 GND.2@68.097,36.703 HC-SR04.4 R01.2 R40.2 R42.2 R47.2 R48.2 VCC.1@67.996,6.502 VCC.2@59.868,6.731 | length 208.9
  Top Layer w0.508: HC-SR04.4 -0.635,45.263 v1(1.219,43.409) 1.219,37.287 v1(1.143,37.211) ; R42.2 48.062,34.117 v1(50.622,36.678) ; C26.2@59.563,25.044 C26.2
  Top Layer w0.762: v1@58.496,20.676 58.496,23.978 C26.2@59.563,25.044 ; v1(58.776,14.388) 62.179,14.388 C28.1 62.675,14.363 63.271,13.767 D1.2
  Top Layer w1.016: B2.1 28.731,6.557 B1.1 ; D1.2 63.271,8.204 61.798,6.731 59.868,6.731 67.767,6.731 VCC.1@67.996,6.502 ; R48.2 67.622,37.381 GND.2@68.148,36.855
  Bottom Layer w0.508: C60.1 2.095,36.297 dianci.20 ; v1(54.171,70.582) 48.946,65.357 48.946,56.045 R40.2 48.971,52.987 48.971,38.049 50.317,36.703 GND.2@68.097,36.703
  Bottom Layer w0.762: v1(58.572,20.879) 58.572,14.592 v1(58.776,14.388)
  Bottom Layer w1.016: C60.1 -0.242,37.198 -6.731,30.709 DIP1.8 DIP1.7 DIP1.6 DIP1.5 -3.974,12.243 3.835,12.243 10.347,5.731 C39.2 20.408,5.731 B2.1 ; C38.2 28.715,6.541 B1.1 32.135,6.68 38.362,12.907 R47.2
  other v1: 38.379,16.434
GND_DIG: C21.1 C22.2 C23.2 C42.2 C43.1 C44.2 C45.1 CAM1.4 R00.2 R02.1 R47.1 U2.1 U8.2 | length 166.3
  Top Layer w0.254: CAM1.4 17.736,81.135 19.202,82.601
  Top Layer w0.508: 19.202,82.601 26.034,82.601 31.826,76.809 v1(31.826,76.835) ; v1(41.453,79.248) 44.628,76.073 48.184,76.073 49.436,74.821 R00.2
  Top Layer w0.762: v1(13.538,25.044) 14.571,24.011 U2.1 v1(16.629,23.754) 16.629,23.68 21.946,18.364 34.544,18.364 v1(36.347,16.561) 38.024,14.884 43.332,14.884 v1@45.136,16.688 ; U8.2@45.136,8.687 v1@45.136,16.688 ; U8.2@45.136,20.5 v1@45.136,16.688 ; R00.2@49.583,73.203 R02.1
  Bottom Layer w0.508: C21.1 15.99,23.114 v1(16.629,23.754) 20.909,23.754 31.865,34.71 31.865,36.776 31.852,36.789 31.852,37.905 31.865,37.918 31.865,39.755 31.852,39.768 31.852,76.81 v1(31.826,76.835) 31.826,77.134 33.94,79.248 v1(41.453,79.248) v1@41.605,79.248
  Bottom Layer w0.762: C45.1 C42.2@45.107,16.866 ; C42.2@45.165,16.909 C44.2 46.367,14.148 C43.1@46.418,14.199
  other v1: 45.136,16.916
GND_MCU: "blue tooth.2" C1.1 C3.2 C4.1 C5.1 C6.2 C7.1 C9.2 C10.1 C11.2 C12.1 C15.2 C17.2 C18.2 C20.2 C32.1 C33.1 C46.2 C47.1 C48.2 C49.1 JLINK1.10 K1.6 K1.17 K1.18 K1.19 K1.20 K1.22 K1.41 K1.42 K1.44 K1.57 K1.71 K1.93 K1.107 K1.121 K1.134 R00.1 R7.1 R37.2 R42.1 SW1.1 U1.1 U9.1 U9.2 Y1.2 | length 230.2
  Top Layer w0.254: v1(3.531,55.436) 3.763,55.203 K1.134 13.529,55.203 18.733,49.999 K1.20 18.733,46.824 ; C15.2 4.738,62.396 ; K1.121 5.442,61.703 4.75,62.396 4.738,62.396 ; v1@10.189,73.076 10.189,72.064 9.733,71.608 K1.107 9.733,69.144 9.195,68.605 5.588,68.605 5.156,68.174 5.156,62.814 4.738,62.396 ; K1.6 11.733,46.661 13.31,45.085 13.31,44.284 C1.1@12.967,43.942 ; v1(13.691,41.681) 14.224,41.681 17.233,44.691 K1.17 ; K1.93 16.733,71.089 17.26,71.616 C11.2 ; K1.22 19.733,46.784 19.533,46.584 18.974,46.584 18.733,46.824 ; v1(26.975,64.77) 26.975,66.305 27.873,67.203 K1.71 32.781,67.203 C9.2 ; v1(27.186,60.579) 27.561,60.203 K1.57 33.345,60.203 v1(33.757,59.792) ; K1.44 28.126,53.703 27.686,53.264 27.686,52.705 28.188,52.203 K1.41 31.744,52.203 32.221,51.726 v1(33.249,51.726) ; U1.1 34.468,43.332 33.528,42.393 21.819,42.393 18.733,45.478 18.733,46.824
  Top Layer w0.508: JLINK1.10 -2.198,62.421 -0.127,62.421 ; R37.2 -1.313,61.235 -0.127,62.421 ; C15.2 3.683,62.421 C20.2 -0.127,62.421 ; v1(8.497,74.473) 8.497,76.188 8.811,76.502 SW1.1 15.141,76.502 17.26,74.383 C11.2 ; C9.2 40.425,67.552 40.97,68.097 39.726,69.342 39.726,71.945 v1(40.755,72.974) 40.831,73.05 R00.1 ; v1(33.249,51.726) 33.249,49.835 35.125,47.958 U1.1@35.125,44.047 ; v1(34.468,41.732) U1.1@34.468,43.332 ; v1(35.953,29.282) 36.698,28.538 U9.1 ; U9.2 39.661,29.808 v1(39.878,29.591)
  Bottom Layer w0.254: v1(8.497,74.473) 9.322,74.473 10.211,73.584 v1(10.211,72.822) ; v1(13.31,43.485) 13.31,42.062 v1(13.691,41.681) ; v1(26.975,64.77) 26.975,60.79 v1(27.186,60.579) ; C17.2 34.251,51.701 34.696,52.146 34.696,58.865 33.77,59.792 v1(33.757,59.792)
  Bottom Layer w0.508: v1(-1.295,53.442) -0.049,53.442 1.983,55.474 3.456,55.474 C10.1 ; Y1.2 35.25,78.334 39.497,78.334 40.933,76.898 C32.1 40.933,73.152 v1(40.755,72.974) ; C47.1 35.797,29.439 v1(35.953,29.282) 36.402,28.833 C46.2 ; C6.2 34.413,40.249 C5.1 35.064,38.164 35.738,37.49 40.234,37.49 40.615,37.109 ; C49.1 40.767,29.603 41.351,30.187 41.351,33.325 v1(40.615,34.061) 40.615,37.109 ; C3.2 41.736,39.945 C4.1 41.238,37.732 40.615,37.109
GND_SEV: C50.2 GND.3 R01.1 R02.2 R44.2 | length 21.9
  Top Layer w1.016: R02.2 v1(56.294,70.62) 61.984,70.62 C50.2
  Bottom Layer w1.016: R44.2 50.538,62.68 56.294,68.435 v1(56.294,70.62)
MOTOR_IN1: 
MOTOR_IN2: 
MOTOR_IN3: 
MOTOR_IN4: 
NetC12_2: C12.2 R2.1 SW1.2 | length 5.4
  Top Layer w0.508: SW1.2 4.702,76.502 5.08,76.124 v1(5.08,74.651)
  Bottom Layer w0.508: v1(5.08,74.651) 6.819,74.651 C12.2
NetC16_1: C16.1 C19.1 K1.33 R4.1 | length 8.5
  Top Layer w0.254: v1(25.523,50.292) 25.233,50.002 K1.33 25.233,46.446 25.82,45.859 C19.1
  Bottom Layer w0.508: v1(25.523,50.292) 26.17,50.939 R4.1
NetC16_2: C16.2 C19.2 K1.32 R3.1 | length 8.7
  Top Layer w0.254: v1(24.023,50.292) 24.733,49.582 K1.32 24.733,46.247 24.32,45.834 C19.2
  Bottom Layer w0.508: R3.1 23.249,51.066 v1(24.023,50.292)
NetC24_1: 
NetC27_2: 
NetC32_2: C32.2 C33.2 L1.2 Y1.4 | length 9.7
  Bottom Layer w0.254: L1.2 36.787,67.953 37.7,68.866 Y1.4 39.255,71.938 C33.2 39.255,74.905 C32.2
NetC34_2: 
NetC35_2: 
NetC36_1: 
NetC37_2: 
NetC40_2: 
NetC41_2: 
NetC42_1: C42.1 C43.2 L3.2 U8.1 | length 9.7
  Top Layer w0.762: U8.1 47.676,17.352 v1(48.137,16.891) 51.102,16.891 L3.2
  Bottom Layer w0.762: C43.2@47.918,14.199 48.137,14.418 v1(48.137,16.891)
NetC48_1: C48.1 C49.2 L2.1 U9.3 U9.4 | length 15.7
  Top Layer w0.508: v1(35.953,31.982) 36.318,32.348 U9.4 ; v1@39.776,31.078 v1(39.802,31.103)
  Top Layer w0.762: U9.3 v1@39.776,31.078 ; v1(39.802,31.103) 49.263,31.103 L2.1
NetC51_2: C51.2 D5.2 R48.1
NetC52_2: 
NetC54_2: 
NetC56_2: 
NetC58_2: 
NetD1_1: D1.1 R8.2 | length 3
  Top Layer w0.254: R8.2 61.336,11.664 D1.1
NetD2_2: D2.2 R37.1 | length 2.4
  Top Layer w0.508: R37.1 -3.404,51.257 D2.2
NetD5_1: D5.1 L4.1 U10.5 U10.6
NetHC-SR04_2: HC-SR04.2 R49.2 | length 4
  Bottom Layer w0.508: HC-SR04.2 -3.223,40.183 R49.2
NetHC-SR04_3: HC-SR04.3 R50.2 | length 7.1
  Top Layer w0.508: HC-SR04.3 -2.388,40.818 -2.388,38.202 -2.376,38.213 R50.2
NetJ1_1: GND.1@68.097,31.623 J1.1
NetR9_2: 
NetR10_2: 
NetR12_2: 
NetR13_2: 
NetR14_2: 
NetR18_2: 
NetR24_2: 
NetR25_2: 
NetR27_2: 
NetR29_2: 
NetR30_2: 
NetR36_2: 
NetR40_1: R40.1 U10.7 U10.8 | length 2.9
  Top Layer w0.762: v1(52.654,54.585) 52.832,54.407 U10.8
NetR41_1: R41.1 U9.8 | length 2.4
  Top Layer w0.508: R41.1 32.431,28.6 U9.8
NetR43_1: R43.1 R44.1 | length 2.9
  Bottom Layer w0.508: R43.1 52.578,59.842 R44.1
NetR43_2: R43.2 R45.2 U10.1 | length 21
  Top Layer w0.508: R45.2 50.894,62.629 50.47,62.205 v1(50.47,56.947) 48.971,55.448 48.971,47.396 50.241,46.126 U10.1
NetR46_2: R46.2 U10.3 | length 2.5
  Top Layer w0.762: U10.3 55.372,47.879 v1(55.88,48.387)
NetR51_2: 
NetR52_2: 
NetR53_2: 
NetR54_2: 
NetR56_2: 
NetR57_2: 
NetR58_2: 
NetR59_2: 
NetR61_2: 
NetR62_2: 
NetR63_2: 
NetR64_2: 
NetR66_2: 
NetR67_2: 
NetR68_2: 
NetR69_2: 
RESET: JLINK1.4 K1.74 R2.2 | length 38.4
  Top Layer w0.254: v1(25.883,71.831) 26.233,71.481 K1.74
  Bottom Layer w0.254: JLINK1.4 -2.642,72.161 ; R2.2 -0.157,74.646 -2.642,72.161 ; v1(25.883,71.831) 25.552,72.161 -2.642,72.161
VCC_3V3: C21.2 C23.1 CAM1.3 dianci.2 R20.1 R21.1 R22.1 R23.1 U2.2 | length 137.2
  Top Layer w0.254: -3.759,82.601 15.672,82.601 17.236,81.036 CAM1.3
  Top Layer w0.508: -8.204,78.156 -3.759,82.601
  Top Layer w0.762: -8.204,78.156 -8.204,33.412 -1.087,26.294 ; v1(-3.22,22.25) -3.22,24.161 -1.087,26.294 ; v1(11.721,23.114) 10.189,24.646 U2.2@10.189,26.294 ; U2.2@16.629,26.294 U2.2@10.189,26.294 ; -1.087,26.294 U2.2@10.189,26.294
  Bottom Layer w0.762: R23.1@-3.22,14.904 R21.1 v1(-3.22,22.25) ; v1(16.629,26.454) 20.815,26.454 dianci.2@30.759,36.398
VCC_7.2V: C25.1 C26.1 C28.2 C29.1 C51.1 J1.2 J1.3 L2.2 L3.1 R8.1 R46.1 U10.2 U10.4 VCC.1@54.788,6.731 VCC.2@67.996,11.582 | length 7.4
  Top Layer w0.762: v1(53.696,48.362) 54.102,47.955 U10.2 54.102,43.764 54.051,43.713 ; U10.4 56.642,43.561 56.667,43.536
VCC_DIG: "blue tooth.1" B1.2 B2.2 C22.1 C38.1 C39.1 C44.1 C45.2 HC-SR04.1 R31.2 R32.2 R33.2 R34.2 U2.3 U8.3 | length 173.6
  Top Layer w0.762: HC-SR04.1 -4.293,35.763 2.738,28.733 16.629,28.733 U2.3 ; v1(13.564,27.889) 14.286,28.611 U2.3 ; v1(26.772,14.834) 27.762,15.824 33.858,15.824 35.763,13.919 35.814,13.97 v1(42.291,13.97) ; 40.97,70.637 47.701,63.906 47.701,60.604 ; v1(42.367,16.815) 42.596,17.043 U8.3 42.596,23.216 ; v1@47.155,27.775 v1(46.533,27.153) 42.596,23.216 ; U2.3 26.989,28.611 30.963,24.638 41.173,24.638 42.596,23.216
  Bottom Layer w0.762: C39.1 R33.2 ; R34.2 17.167,13.103 16.383,12.319 16.383,10.033 17.2,9.216 R33.2 ; C38.1 25.591,5.041 24.917,5.715 24.917,7.671 25.697,8.451 ; R32.2 26.017,14.816 24.943,13.741 24.943,9.205 ; B1.2 28.125,8.451 R31.2 25.697,8.451 ; C44.1@42.354,14.371 C45.2@42.354,16.866 ; 45.314,25.883 47.6,28.169 47.6,63.779 ; R33.2 21.075,9.216 B2.2 24.795,9.057 24.943,9.205 ; 24.943,9.205 25.697,8.451
  other v1: 45.949,26.619 47.168,27.762 47.701,61.011 47.676,62.357 47.752,63.398
VCC_MCU: C3.1 C4.2 C46.1 C47.2 R41.2 U1.3 U9.5 U9.6 U9.7 | length 23.5
  Top Layer w0.508: R41.2 30.506,31.078 U9.6 33.795,31.078 v1(33.934,30.939) ; U9.7 33.286,29.808 33.731,29.362 v1(33.731,26.924)
  Top Layer w0.762: U9.5 32.493,32.925 38.964,39.395 v1(39.573,39.395) ; v1(38.989,41.504) 39.754,42.268 U1.3
  Bottom Layer w0.762: C3.1 39.036,40.148 C4.2
VCC_SEV: C50.1 GND.2@64.668,75.921 L4.2 R45.1 | length 18.2
  Top Layer w1.016: R45.1 51.638,64.592 L4.2
  Top Layer w1.27: C50.1 64.414,64.922 64.897,65.405 64.897,75.692 GND.2@64.668,75.921
VDDA: C13.2 C14.2 K1.31 R3.2 R5.2 | length 14.4
  Top Layer w0.254: v1(23.254,54.414) 22.835,53.995 22.835,50.343 24.233,48.944 K1.31
  Bottom Layer w0.508: R5.2@21.651,57.473 21.928,57.473 22.758,56.642 C13.2 ; v1(23.254,54.414) 23.254,56.012 C13.2 ; C14.2 C13.2
VSSA: C13.1 C14.1 K1.34 R4.2 R7.2 | length 13.8
  Top Layer w0.254: K1.34 25.733,49.101 26.975,50.343 26.975,53.615 v1(26.175,54.414)
  Bottom Layer w0.254: C13.1 C14.1 27.122,58.547 R7.2
  Bottom Layer w0.508: C13.1 26.175,55.851 v1(26.175,54.414)
pads on no net: CAM1.1 CAM1.2 CAM1.15 CAM1.16 CAM1.17 CAM1.18 CAM1.20 CAM1.22 CAM1.23 CAM1.24 CAM1.25 CAM1.26 JLINK1.2 JLINK1.8 K1.21 K1.23 K1.24 K1.25 K1.26 K1.27 K1.28 K1.29 K1.30 K1.35 K1.37 K1.38 K1.39 K1.40 Y1.1

## Polygon pours and split planes (outlines as drawn)
GND on Top Layer "Top Layer-No Net" (solid, remove dead copper, pour order 23): -21.717,102.006 -21.438,101.727 102.057,101.727 102.057,-18.771 96.901,-23.927 96.063,-24.765 -21.971,-24.765
GND_DIG on Top Layer "Top Layer-No Net" (solid, remove dead copper, pour order 11): 16.891,80.442 42.494,80.442 44.983,77.953 45.669,77.267 56.693,77.267 56.693,20.777 54.762,18.847 53.315,17.399 53.315,2.718 36.551,2.718 35.814,1.981 17.247,20.549 11.862,20.549 11.862,75.616 15.977,79.731
GND_MCU on Top Layer "Top Layer-No Net" (solid, remove dead copper, pour order 9): -0.787,78.969 46.38,78.969 47.066,79.654 48.311,78.41 48.311,70.612 48.311,41.961 41.732,35.382 41.732,28.346 41.732,27.432 40.31,26.01 38.1,28.219 26.736,28.219 21.133,28.219 -2.337,51.689 -2.997,52.349 -2.997,61.087 -3.505,61.087 -5.004,62.586 -5.08,62.662 -5.08,75.108
GND_SEV on Top Layer "Top Layer-No Net" (solid, remove dead copper, pour order 3): 59.235,78.791 65.075,78.791 66.116,77.749 65.456,77.089 65.456,63.703 58.674,63.703 54.508,67.869 54.3,70.168 56.018,75.269
GND on Bottom Layer "Top Layer-No Net" (solid, remove dead copper, pour order 21): -17.094,86.792 89.84,86.792 92.024,88.976 92.278,88.722 92.278,-5.486 -12.217,-5.486 -15.189,-8.458
GND_DIG on Bottom Layer "Top Layer-No Net" (solid, remove dead copper, pour order 19): 12.268,26.06 34.455,26.06 36.411,24.105 37.186,23.33 37.186,15.062 41.504,15.062 41.859,14.707 43.002,15.85 43.002,18.39 47.015,18.39 47.269,18.136 48.082,17.323 48.082,12.548 48.082,11.76 46.685,10.363 46.355,10.693 12.827,10.693
GND_MCU on Bottom Layer "Top Layer-No Net" (solid, remove dead copper, pour order 7): 30.505,78.918 31.039,79.451 48.158,79.451 48.158,69.569 48.309,69.418 43.205,64.314 43.205,36.881 42.799,36.881 41.631,35.712 41.783,35.56 41.783,34.29 41.783,29.185 36.652,24.054 35.179,25.527 34.62,25.527 34.62,27.711 34.823,27.915 34.519,28.219 31.877,28.219 31.877,41.021 31.801,41.097 31.267,40.564 4.597,40.564 4.597,45.364 -2.464,52.426 -2.794,52.756 -2.794,60.503 -2.794,61.417 -5.486,64.11 -4.394,65.202 -1.727,65.202 -1.727,73.127 1.321,76.175 1.118,76.378 1.118,76.708
GND_SEV on Bottom Layer "Top Layer-No Net" (solid, remove dead copper, pour order 5): 49.53,79.654 63.094,79.654 63.932,80.493 64.16,80.264 64.16,58.826 49.073,58.826 47.142,56.896

## Keep-outs
Keep-Out Layer:
  lines w0.254: -10.287,5.804 -10.338,78.181 -10.338,81.765 -10.182,81.921 cw(c-7.747,81.28) -7.621,83.795 ; -10.16,5.804 ccw(c-7.702,6.35) -8.221,3.886 ; -8.382,3.937 70.612,3.937 ; -7.621,83.82 71.12,83.82 ; 70.209,3.889 ccw(c70.631,6.371) 72.908,5.297 ; 71.254,83.817 cw(c70.477,81.421) 72.923,82.017 ; 73,5.486 73,82.017

## Other copper
Top Layer:
  rectangle net GND_MCU: 28.321,52.07 29.972,52.883
  rectangle net GND_MCU: 17.12,47.066 18.898,48.539
  rectangle net 3V3_MCU: 35.408,49.454 39.345,52.273
  rectangle net NetD5_1: 54.991,50.292 61.984,53.086
  rectangle net 3V3_MCU: 36.932,43.002 38.227,51.486
  rectangle net VCC_MCU: 31.674,29.464 33.274,32.766
  rectangle net NetC48_1: 37.059,30.785 38.76,32.69
  rectangle net GND_MCU: 37.062,28.245 38.688,30.074
  rectangle net VCC_7.2V: 52.273,4.445 57.175,44.552
  rectangle net VCC_7.2V: 52.629,15.291 69.698,18.542
  rectangle net VCC_7.2V: 65.405,9.855 70.231,23.343
  rectangle net NetJ1_1: 66.116,24.613 70.129,33.477
  rectangle net GND: 58.725,24.054 63.271,38.075
  rectangle net GND: 58.699,34.874 70.383,38.633
  rectangle net NetR40_1: 52.451,50.521 54.508,52.83
  rectangle net NetD5_1: 55.042,50.622 56.921,58.293
  rectangle net VCC_7.2V: 56.337,45.644 60.808,47.092
  rectangle net NetC51_2: 64.364,41.173 66.396,52.984
  rectangle net VCC_SEV: 53.391,62.916 64.287,66.37
  rectangle net GND_SEV: 60.909,69.672 63.576,77.165
  rectangle net 3V3_MCU: 1.092,70.714 3.124,71.984

## Silkscreen, mask and mechanical layers (free items; w line width, h text height)
Top Overlay:
  lines w0.254: 11.499,22.755 15.309,22.755 ; 11.499,29.867 15.309,29.867
  text "SE16" at 40.742,80.035 h0.4
  text "A8" at 38.989,80.01 h0.4
  text "SE14" at 33.858,79.985 h0.4
  text "SE15" at 36.576,79.959 h0.4
  text "VCC" at 64.16,77.699 h0.4
  text "Vcc" at 42.799,70.561 h0.4
  text "GND" at 42.926,67.92 h0.4
  text "A15" at 42.799,65.532 h0.4
  text "A14" at 42.799,62.357 h0.4
  text "A7" at 38.405,60.884 h0.52
  text "A6" at 38.379,58.217 h0.52
  text "A5" at 38.049,56.413 h0.52
  text "D5" at 38.354,53.01 h0.52
  text "GND" at -5.258,46.939 h0.52
  text "VCC" at -7.29,37.389 h0.52
  text "A13" at 32.664,14.275 h0.4
  text "A11" at 16.154,13.919 h0.4
  text "A12" at 32.614,11.963 h0.4
  text "A10" at 16.053,11.328 h0.4
  text "VCC" at 32.715,9.246 h0.4
  text "Vcc" at 16.053,8.915 h0.4
  text "GND" at 32.817,6.528 h0.4
  text "GND" at 16.154,6.147 h0.4
Bottom Overlay:
  text "+" at 38.506,42.723 h0.5
  text "+" at 37.516,40.03 h0.5
  text "+" at 35.382,32.715 h0.5
  text "+" at 11.963,27.584 h0.5
  text "+" at 17.907,26.975 h0.5
  text "+" at 32.588,26.772 h0.5
  text "+" at 48.831,16.231 h0.76
  text "+" at 40.919,13.132 h0.5
Top Solder:
  drawing of 2059 lines, arcs and shapes, not listed
  text "V笑面队" at 52.654,81.077 h2
  text "2019/4/22" at 52.172,78.308 h2
  text "第十四届恩智浦智能车小白四轮" at 69.088,70.968 h2 r270
  text "南京理工大学泰州科技学院" at 71.018,69.723 h2 r270

## Text inside footprints (layer, text, board x,y; h text height)
D1: Top Overlay "+" at 59.969,11.176 h1.02
D2: Top Overlay "+" at 0.025,51.511 h1.02 r180
dianci: Top Overlay "Vcc" at 29.972,34.061 h0.5; Top Overlay "GND" at 6.96,33.909 h0.5
JLINK1: Top Overlay "VCC" at -6.401,77.064 h0.51 r270; Top Overlay "GND" at -3.988,62.179 h0.76 r270